# Allegro board PMOD2BNCSIMPLE_v1_04.brd
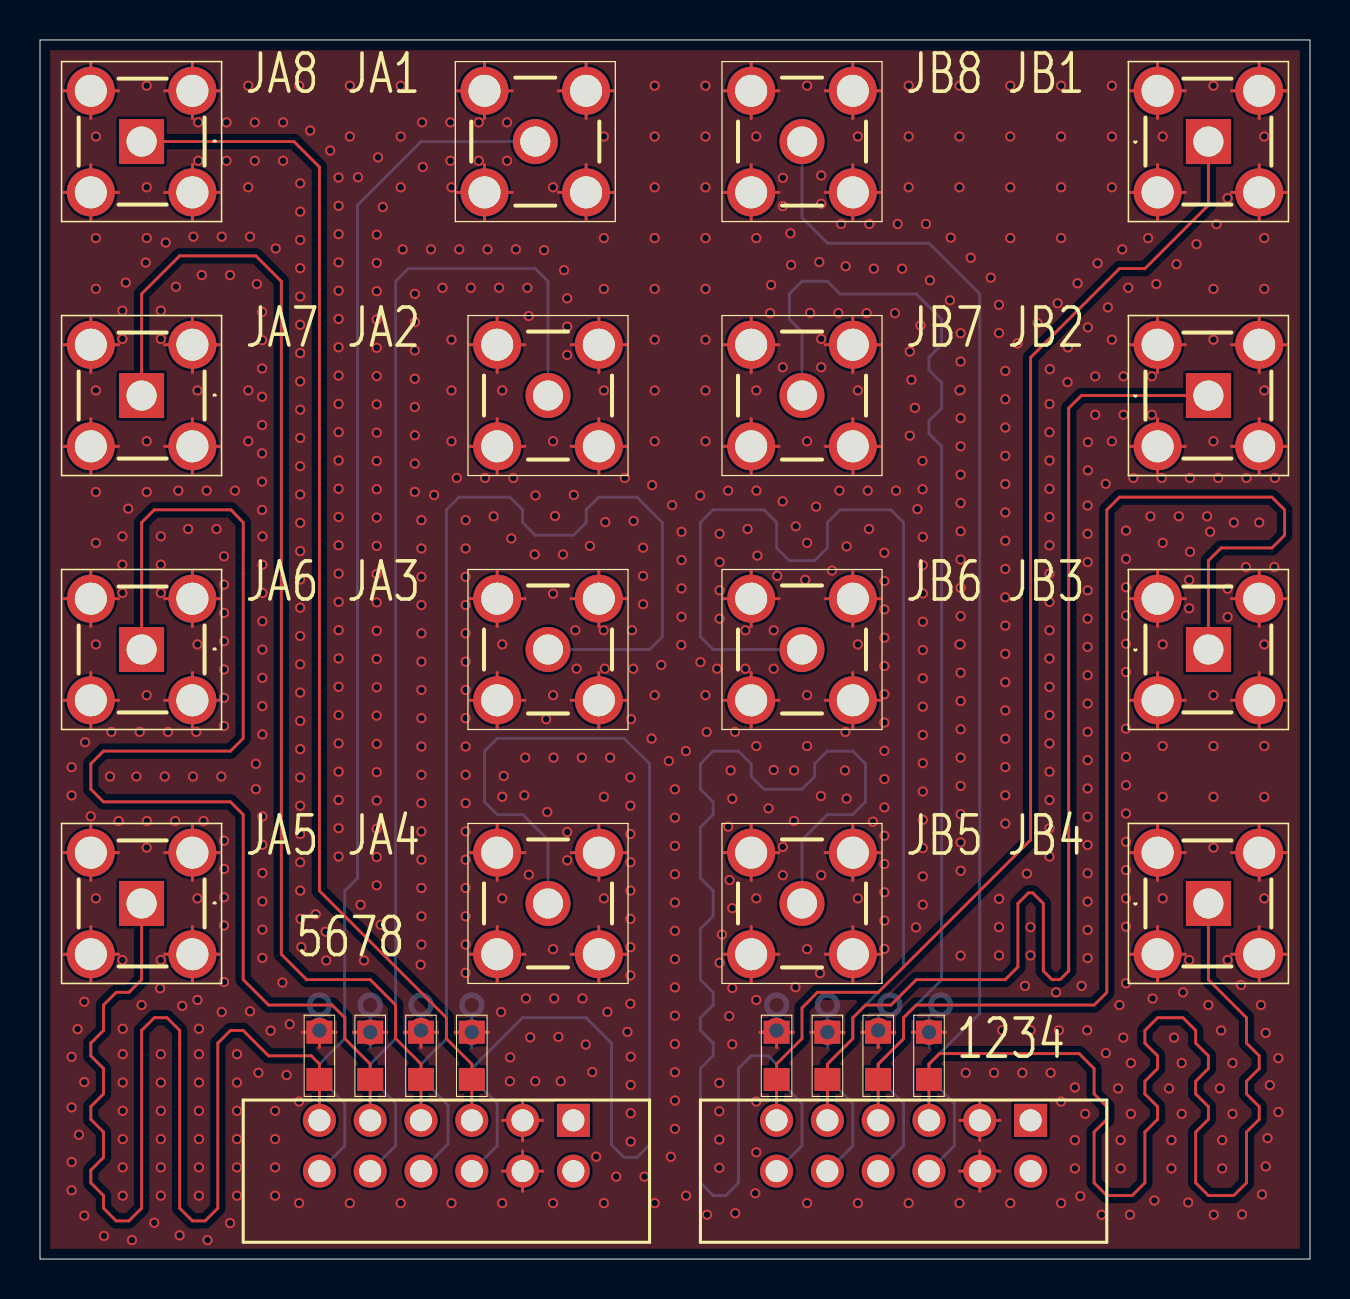
[diagram p0: board, top side]
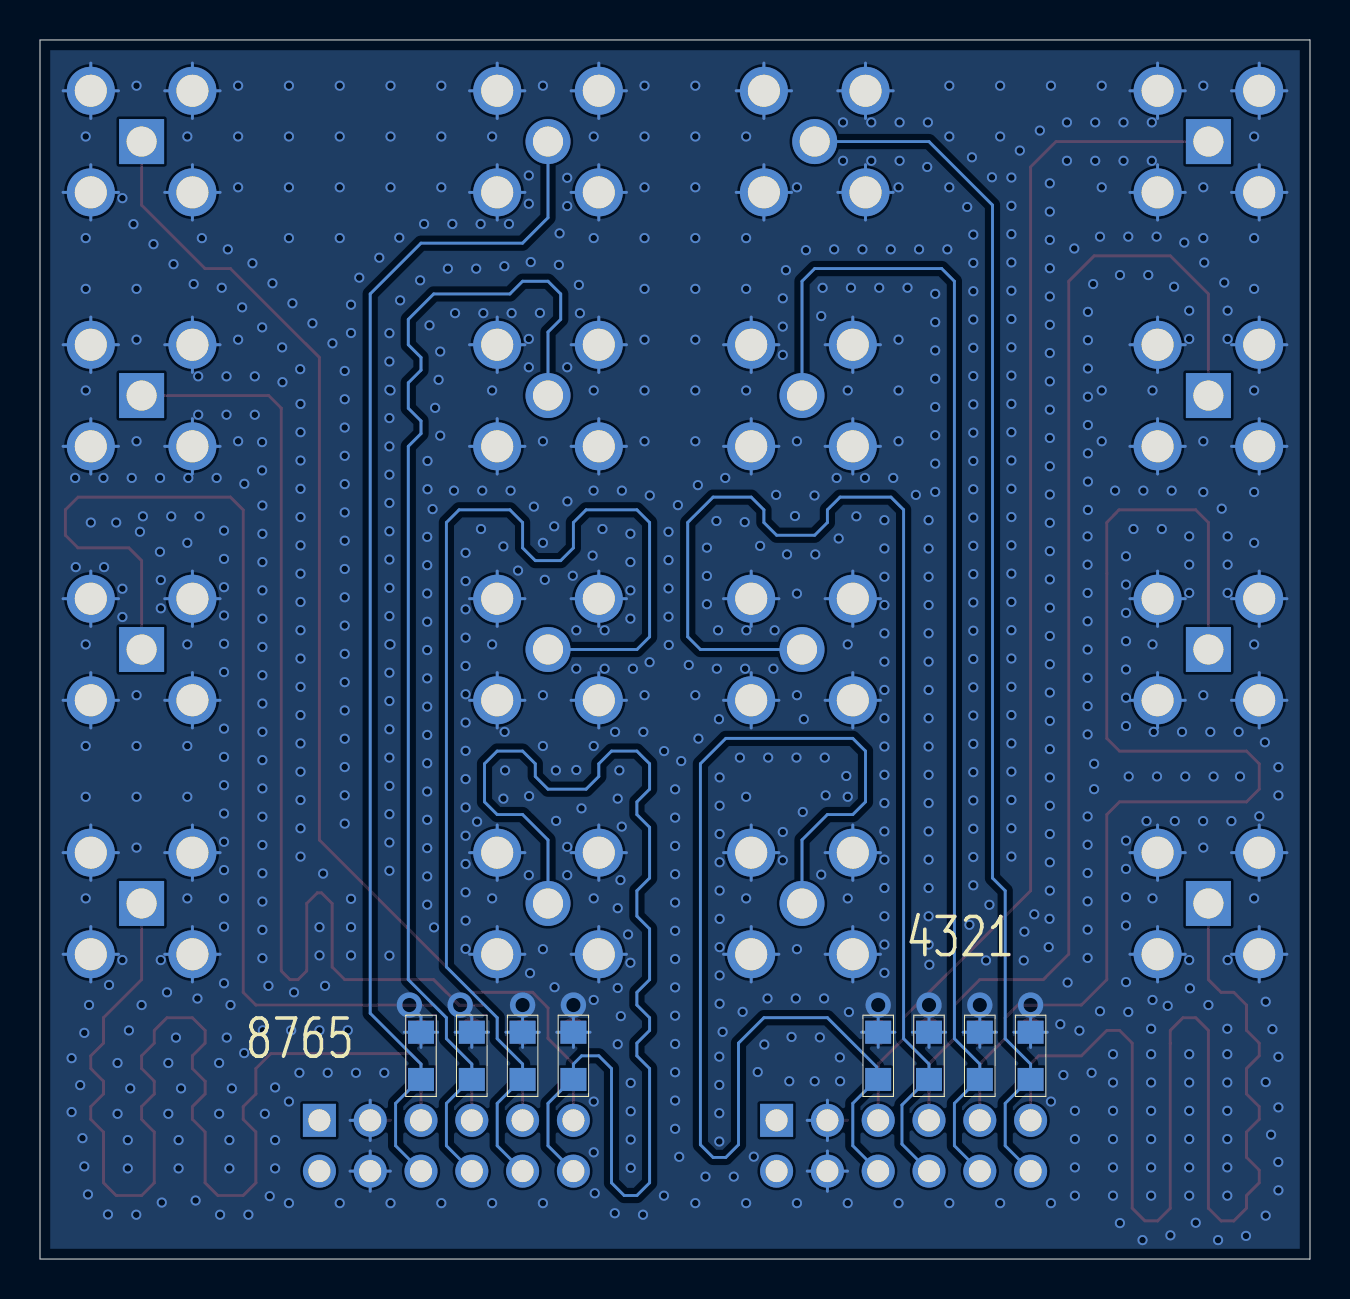
[diagram p1: board, bottom side, seen from below]

Outline 63.5 x 60.96 mm; copper layers: TOP, GND1, GND2, BOTTOM. Coordinates in mm from the lower left corner of the outline.
Outline path: 0,60.96 63.5,60.96 63.5,0 0,0 0,60.96

## Design rules (mm)
constraint set DEFAULT: min track width 0.145

## Placement (name value [footprint] x y rotation side)
J1  71764_0114  [717640112]  10.16 0.84 180 top
J2  71764_0114  [717640112]  33.02 0.84 180 top
R1  -  [RES_0805]  21.59 10.16 90 top
R2  -  [RES_0805]  19.05 10.16 90 top
R3  -  [RES_0805]  16.51 10.16 90 top
R4  -  [RES_0805]  13.97 10.16 90 top
R5  -  [RES_0805]  13.97 10.16 90 bottom
R6  -  [RES_0805]  16.51 10.16 90 bottom
R7  -  [RES_0805]  19.05 10.16 90 bottom
R8  -  [RES_0805]  21.59 10.16 90 bottom
R9  -  [RES_0805]  44.45 10.16 90 top
R10  -  [RES_0805]  41.91 10.16 90 top
R11  -  [RES_0805]  39.37 10.16 90 top
R12  -  [RES_0805]  36.83 10.16 90 top
R13  -  [RES_0805]  36.83 10.16 90 bottom
R14  -  [RES_0805]  39.37 10.16 90 bottom
R15  -  [RES_0805]  41.91 10.16 90 bottom
R16  -  [RES_0805]  44.45 10.16 90 bottom
U1  -  [SMA-R-RA]  5.08 17.78 180 top
U2  -  [SMAFST_PCBN]  24.77 55.88 0 top
U3  -  [SMA-R-RA]  5.08 30.48 180 top
U4  -  [SMAFST_PCBN]  25.4 43.18 0 top
U5  -  [SMA-R-RA]  5.08 43.18 180 top
U6  -  [SMAFST_PCBN]  25.4 30.48 0 top
U7  -  [SMA-R-RA]  5.08 55.88 180 top
U8  -  [SMAFST_PCBN]  25.4 17.78 0 top
U9  -  [SMA-R-RA]  58.42 55.88 0 top
U10  -  [SMAFST_PCBN]  38.1 17.78 0 top
U11  -  [SMA-R-RA]  58.42 43.18 0 top
U12  -  [SMAFST_PCBN]  38.1 30.48 0 top
U13  -  [SMA-R-RA]  58.42 30.48 0 top
U14  -  [SMAFST_PCBN]  38.1 43.18 0 top
U15  -  [SMA-R-RA]  58.42 17.78 0 top
U16  -  [SMAFST_PCBN]  38.1 55.88 0 top

## Library data of the parts
J1 J2 = 71764_0114
R1-R3 R5-R16 = RES_0805
R4 = RES_0805: signal model: resistorPack_850
U1 U3 U5 U7 U9 U11 U13 U15 = SMA-R-RA
U2 U4 U6 U8 U10 U12 U14 U16 = SMAFST_PCBN

## Footprints (pads in the part's own frame, mm; a bottom-side part is the same pattern mirrored in y, then rotated)
717640112
  rect 1.651x1.651 hole 1.1: 1(-16.51,-6.096)
  round 1.651 hole 1.1: 2(-16.51,-3.556) 3(-13.97,-6.096) 4(-13.97,-3.556) 5(-11.43,-6.096) 6(-11.43,-3.556) 7(-8.89,-6.096) 8(-8.89,-3.556) 9(-6.35,-6.096) 10(-6.35,-3.556) 11(-3.81,-6.096) 12(-3.81,-3.556)
RES_0805
  rect 1.151x1.3 smd: 1(1.181,0) 2(-1.181,0)
SMA-R-RA
  rect 2.25x2.25 hole 1.501: 1(0,0)
  round 2.4 hole 1.6: 2(-2.54,2.54) 3(-2.54,-2.54) 4(2.54,-2.54) 5(2.54,2.54)
SMAFST_PCBN
  round 2.25 hole 1.501: 1(0,0)
  round 2.4 hole 1.6: 2(-2.54,-2.54) 3(2.54,-2.54) 4(2.54,2.54) 5(-2.54,2.54)

## Nets
GND: J1.3 J1.4 J2.3 J2.4 R1.1 R2.1 R3.1 R4.1 R5.1 R6.1 R7.1 R8.1 R9.1 R10.1 R11.1 R12.1 R13.1 R14.1 R15.1 R16.1 U1.2 U1.3 U1.4 U1.5 U2.2 U2.3 U2.4 U2.5 U3.2 U3.3 U3.4 U3.5 U4.2 U4.3 U4.4 U4.5 U5.2 U5.3 U5.4 U5.5 U6.2 U6.3 U6.4 U6.5 U7.2 U7.3 U7.4 U7.5 U8.2 U8.3 U8.4 U8.5 U9.2 U9.3 U9.4 U9.5 U10.2 U10.3 U10.4 U10.5 U11.2 U11.3 U11.4 U11.5 U12.2 U12.3 U12.4 U12.5 U13.2 U13.3 U13.4 U13.5 U14.2 U14.3 U14.4 U14.5 U15.2 U15.3 U15.4 U15.5 U16.2 U16.3 U16.4 U16.5
N17882: J1.11 R4.2 U1.1
N17894: J1.9 R3.2 U3.1
N17906: J1.7 R2.2 U5.1
N17918: J1.5 R1.2 U7.1
N17930: J1.12 R5.2 U2.1
N17948: J1.10 R6.2 U4.1
N17973: J1.8 R7.2 U6.1
N17998: J1.6 R8.2 U8.1
N19655: J2.11 R12.2 U9.1
N19661: J2.9 R11.2 U11.1
N19667: J2.7 R10.2 U13.1
N19673: J2.5 R9.2 U15.1
N19679: J2.12 R13.2 U10.1
N19687: J2.10 R14.2 U12.1
N19697: J2.8 R15.2 U14.1
N19707: J2.6 R16.2 U16.1

Pads without a net: J1 1 2; J2 1 2

## Via types
v1: diameter 0.508, hole 0.33, TOP to BOTTOM, 855 vias
v2: diameter 1.27, hole 0.711, TOP to GND1, 8 vias
v3: diameter 1.27, hole 0.711, GND2 to BOTTOM, 8 vias

## Routing (per net, layer and track width the routed paths; a pad name or vN(x,y) marks a point on that pad's centre or on a via; arc(x,y) is an arc through that point)
GND: length 1527.2
  TOP w0.145: 23.12,4.39 J1.4 ; J1.4 24.13,3.39 ; J1.4 25.14,4.39 ; J1.4 24.13,5.4 ; U1.3 7.62,21.7 ; U1.3 6.24,20.32 ; U1.3 9,20.32 ; U1.3 7.62,18.94 ; U10.2 36.94,15.24 ; U10.2 34.18,15.24 ; U10.2 35.56,16.62 ; U10.2 35.56,13.86 ; 21.48,20.32 U8.5 ; U8.5 22.86,18.94 ; U8.5 22.86,21.7 ; U8.5 24.24,20.32 ; 60.96,13.86 U15.4 ; U15.4 60.96,16.62 ; U15.4 62.34,15.24 ; U15.4 59.58,15.24 ; U1.2 9,15.24 ; U1.2 7.62,16.62 ; U1.2 6.24,15.24 ; U1.2 7.62,13.86 ; 39.26,20.32 U10.4 ; U10.4 42.02,20.32 ; U10.4 40.64,21.7 ; U10.4 40.64,18.94 ; 60.96,39.26 U11.4 ; U11.4 62.34,40.64 ; U11.4 59.58,40.64 ; U11.4 60.96,42.02 ; U3.3 9,33.02 ; U3.3 6.24,33.02 ; U3.3 7.62,34.4 ; U3.3 7.62,31.64 ; U15.5 62.34,20.32 ; U15.5 59.58,20.32 ; U15.5 60.96,18.94 ; U15.5 60.96,21.7 ; 1.16,58.42 U7.4 ; U7.4 2.54,59.8 ; U7.4 3.92,58.42 ; U7.4 2.54,57.04 ; U10.5 36.94,20.32 ; U10.5 35.56,18.94 ; U10.5 34.18,20.32 ; U10.5 35.56,21.7 ; U8.4 27.94,21.7 ; U8.4 26.56,20.32 ; U8.4 27.94,18.94 ; U8.4 29.32,20.32 ; U14.4 42.02,45.72 ; U14.4 40.64,44.34 ; U14.4 39.26,45.72 ; U14.4 40.64,47.1 ; 40.64,51.96 U16.3 ; U16.3 42.02,53.34 ; U16.3 40.64,54.72 ; U16.3 39.26,53.34 ; 34.18,27.94 U12.2 ; U12.2 35.56,26.56 ; U12.2 36.94,27.94 ; U12.2 35.56,29.32 ; 43.62,11.34 v2(44.45,11.34) 45.28,11.34 ; U5.3 7.62,47.1 ; U5.3 9,45.72 ; U5.3 6.24,45.72 ; U5.3 7.62,44.34 ; 2.54,18.94 U1.4 ; U1.4 3.92,20.32 ; U1.4 1.16,20.32 ; U1.4 2.54,21.7 ; 59.58,45.72 U11.5 ; U11.5 62.34,45.72 ; U11.5 60.96,47.1 ; U11.5 60.96,44.34 ; 19.05,10.58 R2.1 ; R2.1 18.22,11.34 ; R2.1 19.88,11.34 ; U5.4 3.92,45.72 ; U5.4 2.54,44.34 ; U5.4 2.54,47.1 ; U5.4 1.16,45.72 ; U12.3 40.64,29.32 ; U12.3 40.64,26.56 ; U12.3 42.02,27.94 ; U12.3 39.26,27.94 ; 22.86,13.86 U8.2 ; U8.2 21.48,15.24 ; U8.2 22.86,16.62 ; U8.2 24.24,15.24 ; U11.2 55.88,47.1 ; U11.2 54.5,45.72 ; U11.2 55.88,44.34 ; U11.2 57.26,45.72 ; U14.3 40.64,42.02 ; U14.3 40.64,39.26 ; U14.3 39.26,40.64 ; U14.3 42.02,40.64 ; 36,11.34 R12.1 ; R12.1 36.83,10.58 ; R12.1 37.66,11.34 ; 34.18,45.72 U14.5 ; U14.5 35.56,44.34 ; U14.5 35.56,47.1 ; U14.5 36.94,45.72 ; 39.26,15.24 U10.3 ; U10.3 40.64,13.86 ; U10.3 42.02,15.24 ; U10.3 40.64,16.62 ; R4.1 14.8,11.34 ; R4.1 13.97,10.58 ; R4.1 13.14,11.34 ; 59.58,58.42 U9.5 ; U9.5 60.96,57.04 ; U9.5 60.96,59.8 ; U9.5 62.34,58.42 ; U7.5 3.92,53.34 ; U7.5 2.54,54.72 ; U7.5 2.54,51.96 ; U7.5 1.16,53.34 ; U15.3 57.26,15.24 ; U15.3 55.88,13.86 ; U15.3 54.5,15.24 ; U15.3 55.88,16.62 ; 22.23,51.96 U2.2 ; U2.2 22.23,54.72 ; U2.2 20.84,53.34 ; U2.2 23.61,53.34 ; U9.3 57.26,53.34 ; U9.3 54.5,53.34 ; U9.3 55.88,54.72 ; U9.3 55.88,51.96 ; 59.58,33.02 U13.5 ; U13.5 60.96,34.4 ; U13.5 60.96,31.64 ; U13.5 62.34,33.02 ; 35.56,57.04 U16.5 ; U16.5 34.18,58.42 ; U16.5 35.56,59.8 ; U16.5 36.94,58.42 ; U14.2 36.94,40.64 ; U14.2 35.56,42.02 ; U14.2 35.56,39.26 ; U14.2 34.18,40.64 ; 40.2,11.34 v2(39.37,11.34) 38.54,11.34 ; 54.5,33.02 U13.2 ; U13.2 55.88,34.4 ; U13.2 57.26,33.02 ; U13.2 55.88,31.64 ; U6.4 29.32,33.02 ; U6.4 26.56,33.02 ; U6.4 27.94,34.4 ; U6.4 27.94,31.64 ; 39.26,58.42 U16.4 ; U16.4 40.64,57.04 ; U16.4 42.02,58.42 ; U16.4 40.64,59.8 ; U6.2 24.24,27.94 ; U6.2 22.86,26.56 ; U6.2 21.48,27.94 ; U6.2 22.86,29.32 ; 54.5,58.42 U9.2 ; U9.2 55.88,59.8 ; U9.2 57.26,58.42 ; U9.2 55.88,57.04 ; 2.54,26.56 U3.5 ; U3.5 1.16,27.94 ; U3.5 2.54,29.32 ; U3.5 3.92,27.94 ; J2.3 48,6.93 ; J2.3 46.99,7.94 ; J2.3 46.99,5.93 ; J2.3 45.98,6.93 ; 34.18,33.02 U12.5 ; U12.5 35.56,34.4 ; U12.5 35.56,31.64 ; U12.5 36.94,33.02 ; U4.3 29.32,40.64 ; U4.3 27.94,39.26 ; U4.3 26.56,40.64 ; U4.3 27.94,42.02 ; 23.12,6.93 J1.3 ; J1.3 24.13,5.93 ; J1.3 25.14,6.93 ; J1.3 24.13,7.94 ; 6.24,27.94 U3.2 ; U3.2 7.62,26.56 ; U3.2 9,27.94 ; U3.2 7.62,29.32 ; 2.54,13.86 U1.5 ; U1.5 2.54,16.62 ; U1.5 1.16,15.24 ; U1.5 3.92,15.24 ; 60.96,26.56 U13.4 ; U13.4 59.58,27.94 ; U13.4 62.34,27.94 ; U13.4 60.96,29.32 ; 20.76,11.34 v2(21.59,11.34) 22.42,11.34 ; U8.3 27.94,16.62 ; U8.3 27.94,13.86 ; U8.3 29.32,15.24 ; U8.3 26.56,15.24 ; U2.4 27.3,59.8 ; U2.4 28.69,58.42 ; U2.4 25.92,58.42 ; U2.4 27.3,57.04 ; 55.88,26.56 U13.3 ; U13.3 57.26,27.94 ; U13.3 55.88,29.32 ; U13.3 54.5,27.94 ; U4.5 22.86,47.1 ; U4.5 21.48,45.72 ; U4.5 24.24,45.72 ; U4.5 22.86,44.34 ; 59.58,53.34 U9.4 ; U9.4 60.96,54.72 ; U9.4 62.34,53.34 ; U9.4 60.96,51.96 ; 2.54,39.26 U5.5 ; U5.5 1.16,40.64 ; U5.5 2.54,42.02 ; U5.5 3.92,40.64 ; R10.1 42.74,11.34 ; R10.1 41.08,11.34 ; R10.1 41.91,10.58 ; U15.2 57.26,20.32 ; U15.2 55.88,21.7 ; U15.2 54.5,20.32 ; U15.2 55.88,18.94 ; U6.5 24.24,33.02 ; U6.5 22.86,34.4 ; U6.5 21.48,33.02 ; U6.5 22.86,31.64 ; 1.16,33.02 U3.4 ; U3.4 2.54,31.64 ; U3.4 3.92,33.02 ; U3.4 2.54,34.4 ; 27.94,44.34 U4.4 ; U4.4 27.94,47.1 ; U4.4 29.32,45.72 ; U4.4 26.56,45.72 ; 26.56,27.94 U6.3 ; U6.3 27.94,29.32 ; U6.3 27.94,26.56 ; U6.3 29.32,27.94 ; U11.3 55.88,42.02 ; U11.3 55.88,39.26 ; U11.3 57.26,40.64 ; U11.3 54.5,40.64 ; U7.2 9,53.34 ; U7.2 6.24,53.34 ; U7.2 7.62,54.72 ; U7.2 7.62,51.96 ; U12.4 40.64,34.4 ; U12.4 39.26,33.02 ; U12.4 40.64,31.64 ; U12.4 42.02,33.02 ; U16.2 35.56,54.72 ; U16.2 36.94,53.34 ; U16.2 35.56,51.96 ; U16.2 34.18,53.34 ; 20.84,58.42 U2.5 ; U2.5 22.23,57.04 ; U2.5 23.61,58.42 ; U2.5 22.23,59.8 ; 7.62,57.04 U7.3 ; U7.3 7.62,59.8 ; U7.3 6.24,58.42 ; U7.3 9,58.42 ; 21.48,40.64 U4.2 ; U4.2 24.24,40.64 ; U4.2 22.86,42.02 ; U4.2 22.86,39.26 ; J2.4 48,4.39 ; J2.4 46.99,5.4 ; J2.4 46.99,3.39 ; J2.4 45.98,4.39 ; U2.3 28.69,53.34 ; U2.3 27.3,51.96 ; U2.3 25.92,53.34 ; U2.3 27.3,54.72 ; 15.68,11.34 v2(16.51,11.34) 17.34,11.34 ; 7.62,39.26 U5.2 ; U5.2 7.62,42.02 ; U5.2 9,40.64 ; U5.2 6.24,40.64
  GND1 w0.145: U6.4 27.94,34.4 ; U6.4 27.94,31.64 ; U6.4 26.56,33.02 ; U6.4 29.32,33.02 ; U2.5 23.61,58.42 ; U2.5 22.23,59.8 ; U2.5 22.23,57.04 ; U2.5 20.84,58.42 ; 54.5,53.34 U9.3 ; U9.3 55.88,54.72 ; U9.3 55.88,51.96 ; U9.3 57.26,53.34 ; 34.18,20.32 U10.5 ; U10.5 35.56,21.7 ; U10.5 35.56,18.94 ; U10.5 36.94,20.32 ; 54.5,15.24 U15.3 ; U15.3 57.26,15.24 ; U15.3 55.88,13.86 ; U15.3 55.88,16.62 ; U3.4 2.54,34.4 ; U3.4 1.16,33.02 ; U3.4 2.54,31.64 ; U3.4 3.92,33.02 ; U6.5 22.86,34.4 ; U6.5 22.86,31.64 ; U6.5 21.48,33.02 ; U6.5 24.24,33.02 ; J1.4 25.14,4.39 ; J1.4 24.13,5.4 ; J1.4 23.12,4.39 ; J1.4 24.13,3.39 ; U2.4 27.3,59.8 ; U2.4 28.69,58.42 ; U2.4 25.92,58.42 ; U2.4 27.3,57.04 ; 6.24,33.02 U3.3 ; U3.3 7.62,31.64 ; U3.3 7.62,34.4 ; U3.3 9,33.02 ; 23.12,6.93 J1.3 ; J1.3 24.13,7.94 ; J1.3 24.13,5.93 ; J1.3 25.14,6.93 ; U16.5 36.94,58.42 ; U16.5 34.18,58.42 ; U16.5 35.56,59.8 ; U16.5 35.56,57.04 ; U12.2 36.94,27.94 ; U12.2 34.18,27.94 ; U12.2 35.56,29.32 ; U12.2 35.56,26.56 ; U3.2 9,27.94 ; U3.2 6.24,27.94 ; U3.2 7.62,26.56 ; U3.2 7.62,29.32 ; 59.58,58.42 U9.5 ; U9.5 62.34,58.42 ; U9.5 60.96,57.04 ; U9.5 60.96,59.8 ; 2.54,51.96 U7.5 ; U7.5 2.54,54.72 ; U7.5 1.16,53.34 ; U7.5 3.92,53.34 ; 27.94,26.56 U6.3 ; U6.3 27.94,29.32 ; U6.3 29.32,27.94 ; U6.3 26.56,27.94 ; 7.62,44.34 U5.3 ; U5.3 9,45.72 ; U5.3 7.62,47.1 ; U5.3 6.24,45.72 ; 6.24,15.24 U1.2 ; U1.2 9,15.24 ; U1.2 7.62,16.62 ; U1.2 7.62,13.86 ; 54.5,58.42 U9.2 ; U9.2 55.88,57.04 ; U9.2 57.26,58.42 ; U9.2 55.88,59.8 ; 21.48,40.64 U4.2 ; U4.2 24.24,40.64 ; U4.2 22.86,42.02 ; U4.2 22.86,39.26 ; 55.88,31.64 U13.2 ; U13.2 57.26,33.02 ; U13.2 55.88,34.4 ; U13.2 54.5,33.02 ; 60.96,44.34 U11.5 ; U11.5 59.58,45.72 ; U11.5 62.34,45.72 ; U11.5 60.96,47.1 ; U4.3 29.32,40.64 ; U4.3 27.94,42.02 ; U4.3 27.94,39.26 ; U4.3 26.56,40.64 ; U8.5 22.86,21.7 ; U8.5 24.24,20.32 ; U8.5 21.48,20.32 ; U8.5 22.86,18.94 ; U16.4 40.64,59.8 ; U16.4 39.26,58.42 ; U16.4 42.02,58.42 ; U16.4 40.64,57.04 ; 7.62,51.96 U7.2 ; U7.2 7.62,54.72 ; U7.2 6.24,53.34 ; U7.2 9,53.34 ; U8.2 22.86,16.62 ; U8.2 22.86,13.86 ; U8.2 24.24,15.24 ; U8.2 21.48,15.24 ; 40.64,13.86 U10.3 ; U10.3 40.64,16.62 ; U10.3 39.26,15.24 ; U10.3 42.02,15.24 ; U8.3 29.32,15.24 ; U8.3 27.94,16.62 ; U8.3 26.56,15.24 ; U8.3 27.94,13.86 ; U3.5 3.92,27.94 ; U3.5 2.54,29.32 ; U3.5 1.16,27.94 ; U3.5 2.54,26.56 ; U13.3 55.88,29.32 ; U13.3 55.88,26.56 ; U13.3 57.26,27.94 ; U13.3 54.5,27.94 ; U1.3 9,20.32 ; U1.3 6.24,20.32 ; U1.3 7.62,21.7 ; U1.3 7.62,18.94 ; U13.5 60.96,34.4 ; U13.5 60.96,31.64 ; U13.5 62.34,33.02 ; U13.5 59.58,33.02 ; U7.4 2.54,59.8 ; U7.4 2.54,57.04 ; U7.4 1.16,58.42 ; U7.4 3.92,58.42 ; 39.26,53.34 U16.3 ; U16.3 40.64,51.96 ; U16.3 42.02,53.34 ; U16.3 40.64,54.72 ; 40.64,39.26 U14.3 ; U14.3 40.64,42.02 ; U14.3 42.02,40.64 ; U14.3 39.26,40.64 ; U6.2 24.24,27.94 ; U6.2 21.48,27.94 ; U6.2 22.86,29.32 ; U6.2 22.86,26.56 ; 35.56,51.96 U16.2 ; U16.2 36.94,53.34 ; U16.2 34.18,53.34 ; U16.2 35.56,54.72 ; 2.54,39.26 U5.5 ; U5.5 3.92,40.64 ; U5.5 1.16,40.64 ; U5.5 2.54,42.02 ; 39.26,45.72 U14.4 ; U14.4 42.02,45.72 ; U14.4 40.64,47.1 ; U14.4 40.64,44.34 ; 60.96,26.56 U13.4 ; U13.4 59.58,27.94 ; U13.4 62.34,27.94 ; U13.4 60.96,29.32 ; U12.3 42.02,27.94 ; U12.3 40.64,26.56 ; U12.3 40.64,29.32 ; U12.3 39.26,27.94 ; 34.18,40.64 U14.2 ; U14.2 36.94,40.64 ; U14.2 35.56,39.26 ; U14.2 35.56,42.02 ; 20.84,53.34 U2.2 ; U2.2 23.61,53.34 ; U2.2 22.23,51.96 ; U2.2 22.23,54.72 ; U12.4 42.02,33.02 ; U12.4 40.64,34.4 ; U12.4 40.64,31.64 ; U12.4 39.26,33.02 ; 21.48,45.72 U4.5 ; U4.5 24.24,45.72 ; U4.5 22.86,44.34 ; U4.5 22.86,47.1 ; U10.4 40.64,21.7 ; U10.4 42.02,20.32 ; U10.4 40.64,18.94 ; U10.4 39.26,20.32 ; 35.56,44.34 U14.5 ; U14.5 36.94,45.72 ; U14.5 34.18,45.72 ; U14.5 35.56,47.1 ; 54.5,45.72 U11.2 ; U11.2 55.88,47.1 ; U11.2 55.88,44.34 ; U11.2 57.26,45.72 ; U12.5 36.94,33.02 ; U12.5 35.56,34.4 ; U12.5 34.18,33.02 ; U12.5 35.56,31.64 ; U4.4 27.94,47.1 ; U4.4 26.56,45.72 ; U4.4 29.32,45.72 ; U4.4 27.94,44.34 ; 46.99,3.39 J2.4 ; J2.4 45.98,4.39 ; J2.4 48,4.39 ; J2.4 46.99,5.4 ; U7.3 7.62,59.8 ; U7.3 6.24,58.42 ; U7.3 9,58.42 ; U7.3 7.62,57.04 ; 6.24,40.64 U5.2 ; U5.2 9,40.64 ; U5.2 7.62,39.26 ; U5.2 7.62,42.02 ; U15.2 55.88,21.7 ; U15.2 57.26,20.32 ; U15.2 54.5,20.32 ; U15.2 55.88,18.94 ; 1.16,45.72 U5.4 ; U5.4 3.92,45.72 ; U5.4 2.54,44.34 ; U5.4 2.54,47.1 ; U1.4 2.54,21.7 ; U1.4 1.16,20.32 ; U1.4 3.92,20.32 ; U1.4 2.54,18.94 ; 1.16,15.24 U1.5 ; U1.5 2.54,13.86 ; U1.5 2.54,16.62 ; U1.5 3.92,15.24 ; 60.96,39.26 U11.4 ; U11.4 60.96,42.02 ; U11.4 59.58,40.64 ; U11.4 62.34,40.64 ; 26.56,20.32 U8.4 ; U8.4 27.94,21.7 ; U8.4 29.32,20.32 ; U8.4 27.94,18.94 ; 60.96,18.94 U15.5 ; U15.5 62.34,20.32 ; U15.5 60.96,21.7 ; U15.5 59.58,20.32 ; J2.3 48,6.93 ; J2.3 46.99,7.94 ; J2.3 46.99,5.93 ; J2.3 45.98,6.93 ; 54.5,40.64 U11.3 ; U11.3 55.88,39.26 ; U11.3 55.88,42.02 ; U11.3 57.26,40.64 ; 27.3,51.96 U2.3 ; U2.3 28.69,53.34 ; U2.3 27.3,54.72 ; U2.3 25.92,53.34 ; 60.96,13.86 U15.4 ; U15.4 60.96,16.62 ; U15.4 62.34,15.24 ; U15.4 59.58,15.24 ; 59.58,53.34 U9.4 ; U9.4 60.96,54.72 ; U9.4 60.96,51.96 ; U9.4 62.34,53.34 ; U10.2 36.94,15.24 ; U10.2 35.56,16.62 ; U10.2 34.18,15.24 ; U10.2 35.56,13.86
  GND2 w0.145: 55.88,39.26 U11.3 ; U11.3 54.5,40.64 ; U11.3 55.88,42.02 ; U11.3 57.26,40.64 ; U13.3 57.26,27.94 ; U13.3 55.88,26.56 ; U13.3 55.88,29.32 ; U13.3 54.5,27.94 ; U1.2 7.62,16.62 ; U1.2 7.62,13.86 ; U1.2 9,15.24 ; U1.2 6.24,15.24 ; U3.5 2.54,29.32 ; U3.5 2.54,26.56 ; U3.5 3.92,27.94 ; U3.5 1.16,27.94 ; 40.64,57.04 U16.4 ; U16.4 40.64,59.8 ; U16.4 42.02,58.42 ; U16.4 39.26,58.42 ; U6.3 27.94,29.32 ; U6.3 26.56,27.94 ; U6.3 27.94,26.56 ; U6.3 29.32,27.94 ; U11.5 60.96,47.1 ; U11.5 62.34,45.72 ; U11.5 60.96,44.34 ; U11.5 59.58,45.72 ; 7.62,57.04 U7.3 ; U7.3 9,58.42 ; U7.3 6.24,58.42 ; U7.3 7.62,59.8 ; U5.5 3.92,40.64 ; U5.5 2.54,39.26 ; U5.5 1.16,40.64 ; U5.5 2.54,42.02 ; 39.26,45.72 U14.4 ; U14.4 40.64,44.34 ; U14.4 40.64,47.1 ; U14.4 42.02,45.72 ; U10.3 42.02,15.24 ; U10.3 39.26,15.24 ; U10.3 40.64,13.86 ; U10.3 40.64,16.62 ; U13.5 62.34,33.02 ; U13.5 60.96,34.4 ; U13.5 59.58,33.02 ; U13.5 60.96,31.64 ; 54.5,45.72 U11.2 ; U11.2 55.88,44.34 ; U11.2 55.88,47.1 ; U11.2 57.26,45.72 ; U8.5 22.86,21.7 ; U8.5 21.48,20.32 ; U8.5 24.24,20.32 ; U8.5 22.86,18.94 ; U5.4 2.54,47.1 ; U5.4 3.92,45.72 ; U5.4 2.54,44.34 ; U5.4 1.16,45.72 ; 35.56,26.56 U12.2 ; U12.2 34.18,27.94 ; U12.2 36.94,27.94 ; U12.2 35.56,29.32 ; 35.56,18.94 U10.5 ; U10.5 34.18,20.32 ; U10.5 35.56,21.7 ; U10.5 36.94,20.32 ; 6.24,45.72 U5.3 ; U5.3 7.62,47.1 ; U5.3 9,45.72 ; U5.3 7.62,44.34 ; 1.16,53.34 U7.5 ; U7.5 2.54,54.72 ; U7.5 3.92,53.34 ; U7.5 2.54,51.96 ; U6.4 27.94,34.4 ; U6.4 29.32,33.02 ; U6.4 27.94,31.64 ; U6.4 26.56,33.02 ; U16.5 36.94,58.42 ; U16.5 35.56,59.8 ; U16.5 35.56,57.04 ; U16.5 34.18,58.42 ; U6.5 24.24,33.02 ; U6.5 22.86,31.64 ; U6.5 22.86,34.4 ; U6.5 21.48,33.02 ; 39.26,33.02 U12.4 ; U12.4 40.64,31.64 ; U12.4 40.64,34.4 ; U12.4 42.02,33.02 ; 35.56,44.34 U14.5 ; U14.5 34.18,45.72 ; U14.5 35.56,47.1 ; U14.5 36.94,45.72 ; U9.5 60.96,59.8 ; U9.5 59.58,58.42 ; U9.5 60.96,57.04 ; U9.5 62.34,58.42 ; U2.4 28.69,58.42 ; U2.4 27.3,59.8 ; U2.4 27.3,57.04 ; U2.4 25.92,58.42 ; 22.86,44.34 U4.5 ; U4.5 22.86,47.1 ; U4.5 24.24,45.72 ; U4.5 21.48,45.72 ; J2.4 48,4.39 ; J2.4 45.98,4.39 ; J2.4 46.99,3.39 ; J2.4 46.99,5.4 ; 35.56,39.26 U14.2 ; U14.2 36.94,40.64 ; U14.2 34.18,40.64 ; U14.2 35.56,42.02 ; U4.2 24.24,40.64 ; U4.2 22.86,42.02 ; U4.2 21.48,40.64 ; U4.2 22.86,39.26 ; 1.16,15.24 U1.5 ; U1.5 2.54,16.62 ; U1.5 3.92,15.24 ; U1.5 2.54,13.86 ; 2.54,57.04 U7.4 ; U7.4 2.54,59.8 ; U7.4 1.16,58.42 ; U7.4 3.92,58.42 ; U10.4 42.02,20.32 ; U10.4 40.64,18.94 ; U10.4 39.26,20.32 ; U10.4 40.64,21.7 ; U15.5 60.96,21.7 ; U15.5 62.34,20.32 ; U15.5 59.58,20.32 ; U15.5 60.96,18.94 ; U12.3 40.64,29.32 ; U12.3 42.02,27.94 ; U12.3 40.64,26.56 ; U12.3 39.26,27.94 ; 26.56,20.32 U8.4 ; U8.4 27.94,21.7 ; U8.4 27.94,18.94 ; U8.4 29.32,20.32 ; U2.5 23.61,58.42 ; U2.5 22.23,59.8 ; U2.5 20.84,58.42 ; U2.5 22.23,57.04 ; 39.26,53.34 U16.3 ; U16.3 40.64,51.96 ; U16.3 40.64,54.72 ; U16.3 42.02,53.34 ; U10.2 35.56,16.62 ; U10.2 36.94,15.24 ; U10.2 34.18,15.24 ; U10.2 35.56,13.86 ; 23.12,4.39 J1.4 ; J1.4 25.14,4.39 ; J1.4 24.13,5.4 ; J1.4 24.13,3.39 ; U9.4 60.96,54.72 ; U9.4 62.34,53.34 ; U9.4 59.58,53.34 ; U9.4 60.96,51.96 ; J2.3 46.99,7.94 ; J2.3 46.99,5.93 ; J2.3 45.98,6.93 ; J2.3 48,6.93 ; J1.3 24.13,7.94 ; J1.3 25.14,6.93 ; J1.3 24.13,5.93 ; J1.3 23.12,6.93 ; 54.5,33.02 U13.2 ; U13.2 55.88,34.4 ; U13.2 55.88,31.64 ; U13.2 57.26,33.02 ; 39.26,40.64 U14.3 ; U14.3 42.02,40.64 ; U14.3 40.64,39.26 ; U14.3 40.64,42.02 ; 59.58,40.64 U11.4 ; U11.4 62.34,40.64 ; U11.4 60.96,42.02 ; U11.4 60.96,39.26 ; U1.4 3.92,20.32 ; U1.4 2.54,18.94 ; U1.4 1.16,20.32 ; U1.4 2.54,21.7 ; 7.62,18.94 U1.3 ; U1.3 7.62,21.7 ; U1.3 9,20.32 ; U1.3 6.24,20.32 ; 22.86,26.56 U6.2 ; U6.2 24.24,27.94 ; U6.2 22.86,29.32 ; U6.2 21.48,27.94 ; 60.96,26.56 U13.4 ; U13.4 62.34,27.94 ; U13.4 60.96,29.32 ; U13.4 59.58,27.94 ; U4.4 29.32,45.72 ; U4.4 27.94,44.34 ; U4.4 26.56,45.72 ; U4.4 27.94,47.1 ; U5.2 9,40.64 ; U5.2 7.62,39.26 ; U5.2 6.24,40.64 ; U5.2 7.62,42.02 ; U15.2 57.26,20.32 ; U15.2 55.88,18.94 ; U15.2 54.5,20.32 ; U15.2 55.88,21.7 ; U3.4 2.54,34.4 ; U3.4 1.16,33.02 ; U3.4 2.54,31.64 ; U3.4 3.92,33.02 ; U15.3 55.88,16.62 ; U15.3 54.5,15.24 ; U15.3 57.26,15.24 ; U15.3 55.88,13.86 ; U2.3 27.3,54.72 ; U2.3 27.3,51.96 ; U2.3 28.69,53.34 ; U2.3 25.92,53.34 ; 34.18,53.34 U16.2 ; U16.2 35.56,54.72 ; U16.2 36.94,53.34 ; U16.2 35.56,51.96 ; U9.3 57.26,53.34 ; U9.3 55.88,54.72 ; U9.3 55.88,51.96 ; U9.3 54.5,53.34 ; 54.5,58.42 U9.2 ; U9.2 55.88,59.8 ; U9.2 55.88,57.04 ; U9.2 57.26,58.42 ; 21.48,15.24 U8.2 ; U8.2 24.24,15.24 ; U8.2 22.86,13.86 ; U8.2 22.86,16.62 ; 7.62,51.96 U7.2 ; U7.2 7.62,54.72 ; U7.2 9,53.34 ; U7.2 6.24,53.34 ; 60.96,13.86 U15.4 ; U15.4 59.58,15.24 ; U15.4 62.34,15.24 ; U15.4 60.96,16.62 ; U8.3 29.32,15.24 ; U8.3 27.94,13.86 ; U8.3 26.56,15.24 ; U8.3 27.94,16.62 ; U3.3 9,33.02 ; U3.3 7.62,34.4 ; U3.3 7.62,31.64 ; U3.3 6.24,33.02 ; U3.2 9,27.94 ; U3.2 7.62,26.56 ; U3.2 6.24,27.94 ; U3.2 7.62,29.32 ; U2.2 23.61,53.34 ; U2.2 22.23,51.96 ; U2.2 22.23,54.72 ; U2.2 20.84,53.34 ; U12.5 36.94,33.02 ; U12.5 35.56,31.64 ; U12.5 35.56,34.4 ; U12.5 34.18,33.02 ; U4.3 29.32,40.64 ; U4.3 27.94,39.26 ; U4.3 26.56,40.64 ; U4.3 27.94,42.02
  BOTTOM w0.145: 39.26,45.72 U14.4 ; U14.4 40.64,47.1 ; U14.4 42.02,45.72 ; U14.4 40.64,44.34 ; U5.5 3.92,40.64 ; U5.5 2.54,39.26 ; U5.5 1.16,40.64 ; U5.5 2.54,42.02 ; 59.58,15.24 U15.4 ; U15.4 60.96,13.86 ; U15.4 62.34,15.24 ; U15.4 60.96,16.62 ; 22.23,57.04 U2.5 ; U2.5 20.84,58.42 ; U2.5 22.23,59.8 ; U2.5 23.61,58.42 ; U16.2 36.94,53.34 ; U16.2 35.56,51.96 ; U16.2 34.18,53.34 ; U16.2 35.56,54.72 ; 18.22,11.34 R2.1 ; R2.1 19.88,11.34 ; R2.1 v3(19.05,12.7) ; R2.1 19.05,10.58 ; 39.26,27.94 U12.3 ; U12.3 40.64,26.56 ; U12.3 40.64,29.32 ; U12.3 42.02,27.94 ; 35.56,13.86 U10.2 ; U10.2 36.94,15.24 ; U10.2 34.18,15.24 ; U10.2 35.56,16.62 ; U3.5 2.54,29.32 ; U3.5 3.92,27.94 ; U3.5 2.54,26.56 ; U3.5 1.16,27.94 ; U10.5 36.94,20.32 ; U10.5 34.18,20.32 ; U10.5 35.56,21.7 ; U10.5 35.56,18.94 ; U1.3 7.62,21.7 ; U1.3 6.24,20.32 ; U1.3 7.62,18.94 ; U1.3 9,20.32 ; 27.3,57.04 U2.4 ; U2.4 28.69,58.42 ; U2.4 25.92,58.42 ; U2.4 27.3,59.8 ; 1.16,15.24 U1.5 ; U1.5 2.54,13.86 ; U1.5 3.92,15.24 ; U1.5 2.54,16.62 ; U15.5 60.96,21.7 ; U15.5 62.34,20.32 ; U15.5 59.58,20.32 ; U15.5 60.96,18.94 ; U6.2 22.86,29.32 ; U6.2 24.24,27.94 ; U6.2 22.86,26.56 ; U6.2 21.48,27.94 ; U1.4 3.92,20.32 ; U1.4 2.54,21.7 ; U1.4 2.54,18.94 ; U1.4 1.16,20.32 ; 60.96,26.56 U13.4 ; U13.4 59.58,27.94 ; U13.4 62.34,27.94 ; U13.4 60.96,29.32 ; U8.3 27.94,16.62 ; U8.3 26.56,15.24 ; U8.3 29.32,15.24 ; U8.3 27.94,13.86 ; U2.3 27.3,54.72 ; U2.3 28.69,53.34 ; U2.3 27.3,51.96 ; U2.3 25.92,53.34 ; 59.58,33.02 U13.5 ; U13.5 60.96,34.4 ; U13.5 60.96,31.64 ; U13.5 62.34,33.02 ; 39.26,20.32 U10.4 ; U10.4 42.02,20.32 ; U10.4 40.64,21.7 ; U10.4 40.64,18.94 ; 43.62,11.34 v2(44.45,11.34) ; v2(44.45,11.34) 45.28,11.34 ; v2(44.45,11.34) 44.45,10.58 ; v2(44.45,11.34) 44.45,12.12 v3(45.03,12.7) ; 54.5,20.32 U15.2 ; U15.2 55.88,21.7 ; U15.2 57.26,20.32 ; U15.2 55.88,18.94 ; U9.3 57.26,53.34 ; U9.3 55.88,54.72 ; U9.3 55.88,51.96 ; U9.3 54.5,53.34 ; 55.88,31.64 U13.2 ; U13.2 55.88,34.4 ; U13.2 54.5,33.02 ; U13.2 57.26,33.02 ; U16.4 40.64,59.8 ; U16.4 39.26,58.42 ; U16.4 40.64,57.04 ; U16.4 42.02,58.42 ; U12.4 42.02,33.02 ; U12.4 40.64,34.4 ; U12.4 39.26,33.02 ; U12.4 40.64,31.64 ; U14.3 42.02,40.64 ; U14.3 40.64,42.02 ; U14.3 40.64,39.26 ; U14.3 39.26,40.64 ; U12.5 36.94,33.02 ; U12.5 35.56,34.4 ; U12.5 35.56,31.64 ; U12.5 34.18,33.02 ; 60.96,51.96 U9.4 ; U9.4 59.58,53.34 ; U9.4 60.96,54.72 ; U9.4 62.34,53.34 ; 20.76,11.34 v2(21.59,11.34) ; v2(21.59,11.34) v3(21.59,12.7) ; v2(21.59,11.34) 21.59,10.58 ; v2(21.59,11.34) 22.42,11.34 ; U2.2 22.23,54.72 ; U2.2 23.61,53.34 ; U2.2 22.23,51.96 ; U2.2 20.84,53.34 ; R10.1 41.91,12.12 v3(42.49,12.7) ; R10.1 42.74,11.34 ; R10.1 41.91,10.58 ; R10.1 41.08,11.34 ; 39.37,10.58 v2(39.37,11.34) ; v2(39.37,11.34) 40.2,11.34 ; v2(39.37,11.34) v3(39.37,12.7) ; v2(39.37,11.34) 38.54,11.34 ; 22.86,18.94 U8.5 ; U8.5 24.24,20.32 ; U8.5 22.86,21.7 ; U8.5 21.48,20.32 ; 40.64,13.86 U10.3 ; U10.3 39.26,15.24 ; U10.3 40.64,16.62 ; U10.3 42.02,15.24 ; U14.2 36.94,40.64 ; U14.2 35.56,42.02 ; U14.2 35.56,39.26 ; U14.2 34.18,40.64 ; 60.96,39.26 U11.4 ; U11.4 62.34,40.64 ; U11.4 60.96,42.02 ; U11.4 59.58,40.64 ; 26.56,40.64 U4.3 ; U4.3 29.32,40.64 ; U4.3 27.94,42.02 ; U4.3 27.94,39.26 ; 55.88,44.34 U11.2 ; U11.2 54.5,45.72 ; U11.2 57.26,45.72 ; U11.2 55.88,47.1 ; J2.4 48,4.39 ; J2.4 45.98,4.39 ; J2.4 46.99,3.39 ; J2.4 46.99,5.4 ; 6.24,15.24 U1.2 ; U1.2 7.62,16.62 ; U1.2 9,15.24 ; U1.2 7.62,13.86 ; 1.16,33.02 U3.4 ; U3.4 2.54,34.4 ; U3.4 3.92,33.02 ; U3.4 2.54,31.64 ; 26.56,27.94 U6.3 ; U6.3 29.32,27.94 ; U6.3 27.94,26.56 ; U6.3 27.94,29.32 ; U11.5 62.34,45.72 ; U11.5 60.96,47.1 ; U11.5 59.58,45.72 ; U11.5 60.96,44.34 ; 22.86,39.26 U4.2 ; U4.2 24.24,40.64 ; U4.2 21.48,40.64 ; U4.2 22.86,42.02 ; v2(16.51,11.34) v3(16.51,12.7) ; v2(16.51,11.34) 15.68,11.34 ; v2(16.51,11.34) 16.51,10.58 ; v2(16.51,11.34) 17.34,11.34 ; 1.16,58.42 U7.4 ; U7.4 2.54,57.04 ; U7.4 2.54,59.8 ; U7.4 3.92,58.42 ; 54.5,27.94 U13.3 ; U13.3 55.88,29.32 ; U13.3 55.88,26.56 ; U13.3 57.26,27.94 ; U3.2 7.62,29.32 ; U3.2 7.62,26.56 ; U3.2 9,27.94 ; U3.2 6.24,27.94 ; 35.56,57.04 U16.5 ; U16.5 34.18,58.42 ; U16.5 36.94,58.42 ; U16.5 35.56,59.8 ; 23.12,4.39 J1.4 ; J1.4 24.13,3.39 ; J1.4 25.14,4.39 ; J1.4 24.13,5.4 ; U15.3 57.26,15.24 ; U15.3 55.88,16.62 ; U15.3 55.88,13.86 ; U15.3 54.5,15.24 ; 7.62,51.96 U7.2 ; U7.2 6.24,53.34 ; U7.2 7.62,54.72 ; U7.2 9,53.34 ; 26.56,33.02 U6.4 ; U6.4 27.94,31.64 ; U6.4 27.94,34.4 ; U6.4 29.32,33.02 ; R4.1 v3(13.97,12.7) ; R4.1 13.97,10.58 ; R4.1 14.8,11.34 ; R4.1 13.14,11.34 ; U11.3 55.88,42.02 ; U11.3 55.88,39.26 ; U11.3 57.26,40.64 ; U11.3 54.5,40.64 ; U5.3 7.62,47.1 ; U5.3 9,45.72 ; U5.3 7.62,44.34 ; U5.3 6.24,45.72 ; U12.2 35.56,29.32 ; U12.2 36.94,27.94 ; U12.2 35.56,26.56 ; U12.2 34.18,27.94 ; U5.4 3.92,45.72 ; U5.4 2.54,47.1 ; U5.4 2.54,44.34 ; U5.4 1.16,45.72 ; 55.88,57.04 U9.2 ; U9.2 54.5,58.42 ; U9.2 55.88,59.8 ; U9.2 57.26,58.42 ; 59.58,58.42 U9.5 ; U9.5 60.96,57.04 ; U9.5 62.34,58.42 ; U9.5 60.96,59.8 ; 22.86,44.34 U4.5 ; U4.5 21.48,45.72 ; U4.5 24.24,45.72 ; U4.5 22.86,47.1 ; 46.99,5.93 J2.3 ; J2.3 46.99,7.94 ; J2.3 48,6.93 ; U7.3 9,58.42 ; U7.3 7.62,59.8 ; U7.3 6.24,58.42 ; U7.3 7.62,57.04 ; U5.2 7.62,42.02 ; U5.2 6.24,40.64 ; U5.2 7.62,39.26 ; U5.2 9,40.64 ; 21.48,33.02 U6.5 ; U6.5 22.86,34.4 ; U6.5 22.86,31.64 ; U6.5 24.24,33.02 ; 27.94,18.94 U8.4 ; U8.4 26.56,20.32 ; U8.4 27.94,21.7 ; U8.4 29.32,20.32 ; R12.1 37.66,11.34 ; R12.1 36,11.34 ; R12.1 36.83,10.58 ; R12.1 v3(36.83,12.7) ; 21.48,15.24 U8.2 ; U8.2 24.24,15.24 ; U8.2 22.86,13.86 ; U8.2 22.86,16.62 ; 2.54,51.96 U7.5 ; U7.5 1.16,53.34 ; U7.5 3.92,53.34 ; U7.5 2.54,54.72 ; U14.5 36.94,45.72 ; U14.5 35.56,44.34 ; U14.5 34.18,45.72 ; U14.5 35.56,47.1 ; 24.13,5.93 J1.3 ; J1.3 25.14,6.93 ; J1.3 24.13,7.94 ; 26.56,45.72 U4.4 ; U4.4 29.32,45.72 ; U4.4 27.94,44.34 ; U4.4 27.94,47.1 ; 6.24,33.02 U3.3 ; U3.3 7.62,34.4 ; U3.3 7.62,31.64 ; U3.3 9,33.02 ; 39.26,53.34 U16.3 ; U16.3 40.64,54.72 ; U16.3 42.02,53.34 ; U16.3 40.64,51.96
  vias: v1(1.58,24.6) v1(1.58,23.18) v1(1.58,10.11) v1(1.58,7.58) v1(1.58,4.85) v1(1.58,3.43) v1(1.88,11.49) v1(1.95,6.22) v1(2.21,12.87) v1(2.21,8.85) v1(2.21,2.17) v1(2.26,25.84) v1(2.53,22.14) v1(2.79,56.13) v1(2.79,51.05) v1(2.79,48.51) v1(2.79,43.43) v1(2.79,38.35) v1(2.79,35.81) v1(2.79,30.73) v1(2.79,18.03) v1(3.2,1.16) v1(3.5,24.13) v1(3.57,26.36) v1(3.93,21.9) v1(4.12,47.42) v1(4.12,46.01) v1(4.12,36.14) v1(4.12,34.72) v1(4.12,33.31) v1(4.12,14.95) v1(4.14,11.51) v1(4.14,10.24) v1(4.14,8.83) v1(4.14,7.41) v1(4.14,6) v1(4.14,4.58) v1(4.14,3.17) v1(4.29,48.83) v1(4.41,37.52) v1(4.6,0.94) v1(4.82,24.13) v1(4.98,26.36) v1(5.08,12.7) v1(5.33,58.67) v1(5.33,53.59) v1(5.33,51.05) v1(5.29,49.83) v1(5.33,40.89) v1(5.33,38.35) v1(5.33,28.19) v1(5.34,21.9) v1(5.33,20.57) v1(5.71,1.81) v1(6.04,47.42) v1(6.04,46.01) v1(6.04,36.14) v1(6.04,34.72) v1(6.04,33.31) v1(6.04,14.95) v1(6,13.54) v1(6.04,10.24) v1(6.04,8.83) v1(6.04,7.41) v1(6.04,6) v1(6.04,4.58) v1(6.04,3.17) v1(6.24,24.13) v1(6.29,50.83) v1(6.4,26.36) v1(6.8,48.62) v1(6.76,21.9) v1(6.92,38.43) v1(6.98,1.18) v1(7.11,12.66) v1(7.41,36.5) v1(7.67,51.13) v1(7.65,24.13) v1(7.81,26.36) v1(7.91,56.84) v1(7.91,54.92) v1(7.87,43.43) v1(7.87,30.73) v1(7.87,18.03) v1(7.87,12.95) v1(7.95,11.51) v1(7.95,10.24) v1(7.95,8.83) v1(7.95,7.41) v1(7.95,6) v1(7.95,4.58) v1(7.95,3.17) v1(8.09,49.2) v1(8.17,21.9) v1(8.33,38.43) v1(8.37,0.94) v1(8.82,36.5) v1(9.09,51.13) v1(9.07,24.13) v1(9.09,12.35) v1(9.2,35.14) v1(9.2,33.73) v1(9.2,32.31) v1(9.2,30.9) v1(9.2,29.48) v1(9.2,28.07) v1(9.2,26.65) v1(9.2,20.92) v1(9.2,19.51) v1(9.2,18.09) v1(9.2,16.68) v1(9.2,13.85) v1(9.32,56.84) v1(9.32,54.92) v1(9.5,49.2) v1(9.5,1.8) v1(9.75,38.43) v1(9.85,10.24) v1(9.85,8.83) v1(9.85,7.41) v1(9.85,6) v1(9.85,4.58) v1(9.85,3.17) v1(10.41,58.67) v1(10.41,53.59) v1(10.41,43.43) v1(10.41,40.89) v1(10.5,51.13) v1(10.5,12.39) v1(10.74,56.84) v1(10.74,54.92) v1(10.84,48.76) v1(10.79,24.77) v1(10.79,23.5) v1(10.92,9.31) v1(11.1,47.36) v1(11.1,45.95) v1(11.1,44.53) v1(11.1,43.12) v1(11.1,41.7) v1(11.1,40.29) v1(11.1,38.87) v1(11.1,37.46) v1(11.12,36.14) v1(11.12,34.72) v1(11.12,33.31) v1(11.12,31.89) v1(11.12,30.48) v1(11.12,29.06) v1(11.12,27.65) v1(11.12,26.23) v1(11.12,22.13) v1(11.12,20.72) v1(11.12,19.3) v1(11.12,17.89) v1(11.12,16.47) v1(11.12,15.06) v1(11.53,11.42) v1(11.79,50.53) v1(11.76,7.41) v1(11.76,6) v1(11.76,4.58) v1(11.76,3.17) v1(12.12,13.83) v1(12.15,56.84) v1(12.15,54.92) v1(12.33,9.2) v1(12.48,11.74) v1(12.95,58.67) v1(13.01,53.79) v1(13.01,52.38) v1(13.01,50.96) v1(13.01,49.55) v1(13.01,48.13) v1(13.01,46.72) v1(13.01,45.3) v1(13.01,43.89) v1(13.01,42.47) v1(13.01,41.06) v1(13.01,39.64) v1(13.01,38.23) v1(13.01,36.81) v1(13.01,35.4) v1(13.01,33.99) v1(13.01,32.57) v1(13.01,31.16) v1(13.01,29.74) v1(13.01,28.33) v1(13.01,26.91) v1(13.01,25.5) v1(13.01,24.08) v1(13.01,22.67) v1(13.01,21.25) v1(13.01,19.84) v1(13.01,18.42) v1(13.03,17.01) v1(12.95,7.87) v1(12.95,2.79) v1(13.07,15.6) v1(13.51,56.43) v1(13.79,17.24) v1(14.28,16.37) v1(14.31,14.93) v1(14.51,55.43) v1(14.93,54.08) v1(14.93,52.67) v1(14.93,51.25) v1(14.93,49.84) v1(14.93,48.42) v1(14.93,47.01) v1(14.93,45.59) v1(14.93,44.18) v1(14.93,42.76) v1(14.93,41.35) v1(14.93,39.93) v1(14.93,38.52) v1(14.93,37.1) v1(14.93,35.69) v1(14.93,34.27) v1(14.93,32.86) v1(14.93,31.45) v1(14.93,30.03) v1(14.93,28.62) v1(14.93,27.2) v1(14.93,25.79) v1(14.93,24.37) v1(14.93,22.96) v1(14.93,21.54) v1(14.93,20.13) v1(15.49,58.67) v1(15.49,56.13) v1(15.49,2.79) v1(15.9,54.09) v1(16.03,17.71) v1(16.2,14.93) v1(16.84,51.23) v1(16.84,49.81) v1(16.84,48.4) v1(16.84,46.98) v1(16.84,45.57) v1(16.84,44.15) v1(16.84,42.74) v1(16.84,41.32) v1(16.84,39.91) v1(16.84,38.49) v1(16.84,37.08) v1(16.84,35.66) v1(16.84,34.25) v1(16.84,32.83) v1(16.84,31.42) v1(16.84,30.01) v1(16.84,28.59) v1(16.84,27.18) v1(16.84,25.76) v1(16.84,24.35) v1(16.84,22.93) v1(16.84,21.52) v1(16.84,20.1) v1(16.84,18.69) v1(16.9,55.09) v1(17.03,16.71) v1(17.14,52.61) v1(18.03,58.67) v1(18.03,56.13) v1(18.03,53.59) v1(18.03,2.79) v1(18.13,50.49) v1(18.74,48.27) v1(18.74,46.85) v1(18.74,45.44) v1(18.74,44.02) v1(18.74,42.61) v1(18.74,41.19) v1(18.74,39.78) v1(18.74,38.36) v1(19.03,14.71) v1(19.11,56.84) v1(19.14,54.61) v1(19.07,36.95) v1(19.07,35.53) v1(19.07,34.12) v1(19.07,32.7) v1(19.07,31.29) v1(19.07,29.87) v1(19.07,28.46) v1(19.07,27.04) v1(19.07,25.63) v1(19.07,24.21) v1(19.07,22.8) v1(19.07,21.38) v1(19.07,19.97) v1(19.07,18.55) v1(19.07,17.14) v1(19.07,15.73) v1(19.55,50.49) v1(19.71,38.21) v1(20.12,48.57) v1(20.52,56.84) v1(20.52,54.92) v1(20.57,53.59) v1(20.57,45.97) v1(20.57,43.43) v1(20.57,40.89) v1(20.57,2.79) v1(20.84,39.06) v1(20.96,50.49) v1(21.28,36.95) v1(21.28,35.53) v1(21.28,34.12) v1(21.28,32.7) v1(21.28,31.29) v1(21.28,29.87) v1(21.28,28.46) v1(21.28,27.04) v1(21.28,25.63) v1(21.28,24.21) v1(21.28,22.8) v1(21.28,21.38) v1(21.28,19.97) v1(21.28,18.55) v1(21.28,17.14) v1(21.28,15.73) v1(21.28,14.31) v1(21.54,48.57) v1(21.94,56.84) v1(21.94,54.92) v1(22.25,39.06) v1(22.38,50.49) v1(22.68,37.14) v1(22.95,48.57) v1(23.11,43.43) v1(23.11,30.73) v1(23.11,23.11) v1(23.11,18.03) v1(23.05,12.35) v1(23.11,2.79) v1(23.19,24.16) v1(23.35,56.84) v1(23.35,54.92) v1(23.51,10.08) v1(23.5,8.89) v1(23.57,36.03) v1(23.67,39.06) v1(23.79,50.49) v1(24.22,23.19) v1(24.26,25.07) v1(24.3,13.03) v1(24.37,48.57) v1(24.44,47.16) v1(24.44,19.22) v1(24.51,11.08) v1(24.73,35.23) v1(24.78,38.18) v1(24.77,8.89) v1(25.2,50.45) v1(25.31,27) v1(25.36,22.35) v1(25.65,53.59) v1(25.65,40.89) v1(25.65,33.27) v1(25.65,28.19) v1(25.68,25.07) v1(25.65,15.49) v1(25.71,13.03) v1(25.65,2.79) v1(25.75,37.16) v1(25.92,11.1) v1(26.04,8.89) v1(26.15,35.23) v1(26.21,49.45) v1(26.36,48.04) v1(26.36,46.63) v1(26.36,45.21) v1(26.36,21.35) v1(26.36,19.94) v1(26.69,38.21) v1(26.77,31.44) v1(26.83,29.52) v1(27.09,25.07) v1(27.12,13.03) v1(27.28,10.73) v1(27.5,35.66) v1(27.61,9.35) v1(27.81,5.12) v1(28.19,56.13) v1(28.19,51.05) v1(28.19,48.51) v1(28.19,43.43) v1(28.18,31.44) v1(28.24,29.52) v1(28.19,23.11) v1(28.19,18.03) v1(28.19,2.79) v1(28.27,36.85) v1(28.37,12.36) v1(28.51,25.07) v1(28.81,4.12) v1(29.24,39.06) v1(29.37,11.36) v1(29.52,24.08) v1(29.52,22.67) v1(29.52,21.25) v1(29.52,19.84) v1(29.52,18.43) v1(29.52,17.01) v1(29.52,15.6) v1(29.52,14.18) v1(29.52,12.77) v1(29.54,10.12) v1(29.54,8.7) v1(29.54,7.29) v1(29.54,5.88) v1(29.6,31.44) v1(29.55,27) v1(29.68,36.91) v1(29.66,29.52) v1(30.15,35.57) v1(30.15,34.16) v1(30.15,32.74) v1(30.23,4.12) v1(30.61,38.7) v1(30.58,26.02) v1(30.73,58.67) v1(30.73,56.13) v1(30.73,53.59) v1(30.73,51.05) v1(30.73,48.51) v1(30.73,45.97) v1(30.73,43.43) v1(30.73,40.89) v1(30.73,28.19) v1(30.73,2.79) v1(31.06,29.71) v1(31.44,24.9) v1(31.54,5.11) v1(31.61,37.7) v1(31.74,23.49) v1(31.74,22.07) v1(31.74,20.66) v1(31.74,19.24) v1(31.74,17.83) v1(31.74,16.41) v1(31.74,15) v1(31.74,13.58) v1(31.74,12.17) v1(31.74,10.75) v1(31.74,9.34) v1(31.74,7.92) v1(31.74,6.51) v1(32.08,36.37) v1(32.08,34.95) v1(32.08,33.54) v1(32.08,32.12) v1(32.06,30.71) v1(32.3,25.4) v1(32.3,3.17) v1(33.01,38.18) v1(33.02,29.84) v1(33.27,58.67) v1(33.27,56.13) v1(33.27,53.59) v1(33.27,51.05) v1(33.27,48.51) v1(33.27,45.97) v1(33.27,43.43) v1(33.27,40.89) v1(33.27,28.19) v1(33.33,26.36) v1(33.35,2.21) v1(33.86,29.52) v1(33.98,36.27) v1(33.98,34.85) v1(33.98,33.44) v1(33.98,32.02) v1(33.98,14.82) v1(33.96,8.8) v1(33.96,7.39) v1(33.96,5.97) v1(33.96,4.56) v1(34.1,16.23) v1(34.41,38.43) v1(34.41,21.62) v1(34.53,24.43) v1(34.48,18.95) v1(34.46,12.15) v1(34.62,23.02) v1(34.62,17.54) v1(34.62,13.55) v1(34.62,10.74) v1(34.75,26.36) v1(34.76,2.29) v1(35.27,31.44) v1(35.27,29.52) v1(35.38,36.5) v1(35.81,56.13) v1(35.81,51.05) v1(35.81,43.43) v1(35.82,38.43) v1(35.81,25.65) v1(35.81,18.03) v1(35.81,12.95) v1(35.81,7.87) v1(35.81,5.33) v1(35.76,3.29) v1(35.87,35.18) v1(36.43,22.53) v1(36.5,47.3) v1(36.56,48.71) v1(36.69,31.44) v1(36.69,29.52) v1(36.69,24.46) v1(36.86,34.17) v1(37.14,54.07) v1(37.14,52.65) v1(37.14,44.59) v1(37.13,37.89) v1(37.14,20.61) v1(37.14,19.19) v1(37.52,51.29) v1(37.56,49.71) v1(37.71,24.43) v1(37.7,21.91) v1(37.79,36.64) v1(37.77,13.59) v1(38.26,33.96) v1(38.35,58.67) v1(38.35,40.89) v1(38.35,35.81) v1(38.35,28.19) v1(38.35,25.65) v1(38.35,15.49) v1(38.35,2.79) v1(38.5,47.31) v1(38.81,37.63) v1(38.96,49.86) v1(39.04,23.15) v1(39,14.3) v1(39.06,54.19) v1(39.06,52.77) v1(39.06,46.01) v1(39.06,44.59) v1(39.06,19.19) v1(39.6,34.43) v1(39.92,47.3) v1(39.97,38.43) v1(40.05,51.76) v1(40.25,24.43) v1(40.28,49.65) v1(40.33,35.64) v1(40.27,26.36) v1(40.33,23.02) v1(40.89,56.13) v1(40.89,43.43) v1(40.89,30.73) v1(40.89,18.03) v1(40.89,2.79) v1(41.33,47.3) v1(41.39,38.43) v1(41.47,51.76) v1(41.45,36.5) v1(41.65,21.87) v1(41.69,49.52) v1(42.22,35.32) v1(42.22,33.9) v1(42.22,32.49) v1(42.22,31.07) v1(42.22,29.66) v1(42.22,28.24) v1(42.22,26.83) v1(42.22,25.41) v1(42.22,24) v1(42.22,22.58) v1(42.22,21.17) v1(42.22,19.75) v1(42.22,18.34) v1(42.22,16.92) v1(42.22,15.51) v1(42.75,47.3) v1(42.8,38.43) v1(42.88,51.76) v1(43.11,49.52) v1(43.43,58.67) v1(43.43,56.13) v1(43.43,53.59) v1(43.43,2.79) v1(43.49,45.38) v1(43.49,41.17) v1(43.57,43.97) v1(43.74,42.57) v1(43.8,16.58) v1(43.87,37.5) v1(44.03,46.69) v1(44.12,39.91) v1(44.12,38.49) v1(44.14,36.11) v1(44.14,34.7) v1(44.14,33.28) v1(44.14,31.87) v1(44.14,30.45) v1(44.14,29.04) v1(44.14,27.62) v1(44.14,26.21) v1(44.14,24.79) v1(44.14,23.38) v1(44.14,21.96) v1(44.14,20.55) v1(44.14,19.13) v1(44.14,17.72) v1(44.3,51.76) v1(44.49,48.94) v1(45.53,51.07) v1(45.49,47.94) v1(45.97,58.67) v1(45.97,56.13) v1(45.97,53.59) v1(46.03,46.3) v1(46.03,44.88) v1(46.03,43.47) v1(45.97,43.43) v1(46.03,42.05) v1(46.03,40.64) v1(46.03,39.22) v1(46.03,37.81) v1(46.03,36.39) v1(46.03,34.98) v1(46.03,33.56) v1(46.03,32.15) v1(46.03,30.73) v1(45.97,30.73) v1(46.03,29.32) v1(46.03,27.9) v1(46.03,26.49) v1(46.03,25.07) v1(46.03,23.66) v1(46.03,22.25) v1(46.03,20.83) v1(46.03,19.42) v1(46.03,15.17) v1(45.97,2.79) v1(46.29,9.31) v1(46.54,50.07) v1(47.54,49.08) v1(47.7,9.31) v1(47.95,47.72) v1(47.95,46.31) v1(47.95,18.01) v1(47.95,16.6) v1(47.95,15.18) v1(48.11,11.44) v1(48.27,44.41) v1(48.27,42.99) v1(48.27,41.58) v1(48.27,40.17) v1(48.27,38.75) v1(48.27,37.34) v1(48.27,35.92) v1(48.27,34.51) v1(48.27,33.09) v1(48.27,31.68) v1(48.27,30.26) v1(48.27,28.85) v1(48.27,27.43) v1(48.27,26.02) v1(48.27,24.6) v1(48.27,23.19) v1(48.27,21.77) v1(48.51,58.67) v1(48.51,56.13) v1(48.51,53.59) v1(48.51,51.05) v1(48.51,2.79) v1(48.88,45.79) v1(49.12,9.31) v1(49.25,13.66) v1(49.34,19.27) v1(49.52,16.6) v1(49.52,15.18) v1(49.53,11.44) v1(49.88,46.79) v1(50.49,44.5) v1(50.47,42.76) v1(50.47,41.35) v1(50.47,39.93) v1(50.47,38.52) v1(50.47,37.1) v1(50.47,35.69) v1(50.47,34.27) v1(50.47,32.86) v1(50.47,31.44) v1(50.47,30.03) v1(50.47,28.61) v1(50.47,27.2) v1(50.47,25.78) v1(50.47,24.37) v1(50.47,22.95) v1(50.47,21.54) v1(50.47,20.12) v1(50.53,9.31) v1(50.8,13.34) v1(50.88,47.79) v1(50.94,11.44) v1(51.05,58.67) v1(51.05,56.13) v1(51.05,53.59) v1(51.05,51.05) v1(51.05,7.87) v1(51.05,2.79) v1(51.39,45.59) v1(51.38,43.85) v1(51.74,8.58) v1(51.74,5.95) v1(51.74,4.53) v1(51.88,48.79) v1(52.01,3.14) v1(52.08,13.66) v1(52.26,7.26) v1(52.39,46.59) v1(52.4,40.85) v1(52.4,39.44) v1(52.38,37.68) v1(52.38,36.27) v1(52.38,34.85) v1(52.38,33.44) v1(52.38,32.02) v1(52.38,30.61) v1(52.38,29.19) v1(52.38,27.78) v1(52.38,26.36) v1(52.38,24.95) v1(52.38,23.53) v1(52.38,22.12) v1(52.38,20.7) v1(52.38,19.29) v1(52.38,17.87) v1(52.38,16.46) v1(52.38,15.04) v1(52.36,11.44) v1(52.76,44.14) v1(52.76,42.22) v1(52.88,49.79) v1(53.08,2.21) v1(53.28,38.77) v1(53.29,10.3) v1(53.39,47.59) v1(53.59,58.67) v1(53.59,56.13) v1(53.59,53.59) v1(53.59,45.97) v1(53.59,40.89) v1(53.91,8.53) v1(53.98,12.7) v1(54.03,5.95) v1(54.03,4.53) v1(54.11,50.49) v1(54.18,44.14) v1(54.18,42.22) v1(54.16,11.07) v1(54.3,36.43) v1(54.3,35.01) v1(54.3,33.6) v1(54.3,32.18) v1(54.3,30.77) v1(54.3,29.35) v1(54.3,26.52) v1(54.3,25.11) v1(54.3,23.69) v1(54.3,22.28) v1(54.3,20.86) v1(54.3,19.45) v1(54.3,18.03) v1(54.3,16.62) v1(54.3,13.79) v1(54.41,48.57) v1(54.54,9.8) v1(54.54,7.26) v1(54.5,2.21) v1(54.67,39.06) v1(55.41,51.05) v1(55.52,37.14) v1(55.59,44.14) v1(55.59,42.22) v1(55.63,13.03) v1(55.72,2.93) v1(55.82,48.76) v1(56.13,56.13) v1(56.08,39.06) v1(56.13,35.81) v1(56.13,30.73) v1(56.13,25.65) v1(56.13,23.11) v1(56.13,18.03) v1(56.45,8.53) v1(56.57,5.95) v1(56.57,4.53) v1(56.7,11.07) v1(56.82,49.75) v1(56.94,37.14) v1(57.15,13.34) v1(57.08,9.8) v1(57.08,7.26) v1(57.41,2.82) v1(57.5,39.06) v1(57.5,35.37) v1(57.46,33.95) v1(57.46,32.54) v1(57.46,14.95) v1(57.83,50.75) v1(58.35,37.14) v1(58.42,12.7) v1(58.5,36.37) v1(58.67,58.67) v1(58.67,48.51) v1(58.67,45.97) v1(58.67,40.89) v1(58.67,28.19) v1(58.67,25.65) v1(58.67,23.11) v1(58.67,20.57) v1(58.69,2.21) v1(58.83,51.75) v1(58.91,39.06) v1(58.99,8.53) v1(59.05,11.43) v1(59.11,5.95) v1(59.11,4.53) v1(59.38,53.05) v1(59.38,33.52) v1(59.38,32.11) v1(59.38,14.95) v1(59.62,9.8) v1(59.62,7.26) v1(59.69,36.83) v1(60.05,13.7) v1(60.1,2.23) v1(60.33,39.06) v1(60.3,34.6) v1(60.96,36.83) v1(61.05,12.7) v1(61.1,3.23) v1(61.21,56.13) v1(61.21,51.05) v1(61.21,48.51) v1(61.21,43.43) v1(61.21,30.73) v1(61.21,25.65) v1(61.21,23.11) v1(61.21,18.03) v1(61.29,11.31) v1(61.29,4.63) v1(61.38,6.04) v1(61.49,8.69) v1(61.74,39.06) v1(61.71,34.6) v1(61.92,10.04) v1(61.92,7.35) v2(13.97,11.43) v2(19.05,11.43) v2(36.83,11.43) v2(41.91,11.43)
N17882: length 60.2
  TOP w0.145: J1.11 R4.2 13.97,9.76 13.57,10.16 11.43,10.16 10.16,11.43 9.52,11.43 8.89,10.8 8.89,2.54 8.26,1.91 7.62,1.91 6.99,2.54 6.99,10.79 6.98,10.79 6.99,10.8 6.99,11.43 6.35,12.06 5.71,12.06 5.08,11.43 5.08,2.54 4.45,1.91 3.81,1.91 3.17,2.54 3.17,3.17 2.54,3.81 2.54,4.45 3.17,5.08 3.17,6.35 2.54,6.99 2.54,7.62 3.17,8.26 3.17,9.53 2.54,10.16 2.54,10.79 3.17,11.43 3.17,12.7 3.81,13.34 4.45,13.34 5.08,13.97 U1.1
N17894: length 60.1
  TOP w0.145: J1.9 R3.2 16.51,9.75 15.24,11.02 15.24,12.06 14.61,12.7 11.43,12.7 10.16,13.97 10.16,22.23 9.53,22.86 3.17,22.86 2.54,23.5 2.54,24.77 3.17,25.4 9.53,25.4 10.16,26.04 10.16,34.29 10.16,36.83 9.55,37.47 5.71,37.47 5.08,36.83 U3.1
N17906: length 60.1
  TOP w0.145: J1.7 R2.2 19.05,9.76 17.78,11.03 17.78,12.7 16.51,13.97 13.34,13.97 12.06,15.24 12.06,48.89 10.79,50.16 6.98,50.16 5.08,48.26 U5.1
N17918: length 60.2
  TOP w0.145: J1.5 R1.2 21.59,9.75 20.32,11.02 20.32,12.06 13.97,18.41 13.97,54.61 12.7,55.88 U7.1
N17930: length 60.4
  BOTTOM w0.145: U2.1 19.05,55.88 15.88,52.7 15.88,19.05 15.24,18.41 15.24,11.02 13.97,9.75 R5.2 14.04,8.98 15.24,7.78 15.24,5.66 J1.12
N17948: length 59.9
  BOTTOM w0.145: U4.1 25.4,48.9 24.77,49.53 18.41,49.53 17.78,48.9 17.78,11.02 16.51,9.75 R6.2 ; J1.10 17.78,5.66 17.78,7.78 16.58,8.98
N17973: length 60.4
  BOTTOM w0.145: U6.1 30.48,30.48 31.11,31.12 31.11,36.83 29.84,38.1 27.94,38.1 27.3,37.47 27.3,36.83 26.67,36.2 24.77,36.2 24.13,36.83 24.13,37.47 23.5,38.1 20.95,38.1 20.32,37.47 20.32,11.02 19.05,9.75 R7.2 19.12,8.98 20.4,7.7 20.4,5.75 J1.8
N17998: length 60
  BOTTOM w0.145: U8.1 25.4,20.96 24.13,22.23 22.86,22.23 22.23,22.86 22.23,25.4 22.86,26.04 29.21,26.04 30.48,24.77 30.48,5.71 29.84,5.08 29.21,5.08 28.57,5.71 28.57,10.79 27.3,12.07 24.13,12.07 21.66,9.6 21.66,8.98 ; J1.6 22.86,5.66 22.86,7.78 21.66,8.98 ; R8.2 21.66,8.98
N19655: length 60.4
  TOP w0.145: J2.11 R12.2 36.83,9.76 38.1,11.03 38.1,12.55 38.87,13.34 41.91,13.34 49.53,20.95 49.53,45.09 53.98,49.53 55.24,49.53 55.24,49.53 58.42,52.7 U9.1
N19661: length 60.2
  TOP w0.145: U11.1 52.07,43.18 51.44,42.55 51.44,14.4 51,13.97 50.6,13.97 50.16,14.4 50.16,17.78 49.63,18.31 49.43,18.31 48.9,17.78 48.9,14.61 48.26,13.97 43.81,13.97 42.55,12.7 41.28,12.7 40.64,12.06 40.64,11.02 39.37,9.75 R11.2 J2.9
N19667: length 59.9
  TOP w0.145: U13.1 58.42,34.92 59.05,35.56 61.6,35.56 62.23,36.19 62.23,37.47 61.59,38.1 53.98,38.1 53.34,37.46 53.34,13.33 52.71,12.7 43.81,12.7 43.18,12.07 43.18,11.02 41.91,9.75 R10.2 J2.7
N19673: length 60.2
  TOP w0.145: U15.1 58.42,13.97 60.33,12.06 60.33,10.79 60.96,10.16 60.96,9.53 60.33,8.89 60.33,8.26 60.96,7.62 60.96,6.99 60.33,6.35 60.33,3.81 59.69,3.17 58.42,3.17 57.78,3.81 57.78,6.35 58.42,6.99 58.42,7.62 57.78,8.26 57.78,8.89 58.42,9.53 58.42,10.16 57.78,10.79 57.78,11.43 57.15,12.06 55.88,12.06 55.24,11.43 55.24,10.79 55.88,10.16 55.88,9.53 55.24,8.89 55.24,8.26 55.88,7.62 55.88,6.99 55.24,6.35 55.24,3.81 54.61,3.17 53.34,3.17 52.7,3.81 52.7,6.35 53.34,6.99 53.34,7.62 52.7,8.26 52.7,9.53 51.96,10.27 44.97,10.27 44.45,9.75 R9.2 J2.5
N19679: length 60.1
  BOTTOM w0.145: J2.12 38.1,5.66 38.1,7.78 36.9,8.98 R13.2 36.83,9.75 36.42,10.16 35.56,10.16 34.92,9.53 34.92,3.81 34.29,3.17 33.66,3.17 33.02,3.81 33.02,9.53 33.66,10.16 33.66,10.79 33.02,11.43 33.02,12.06 33.66,12.7 33.66,13.34 33.02,13.97 33.02,16.51 33.66,17.14 33.66,18.41 33.02,19.05 33.02,21.59 33.66,22.23 33.66,22.86 33.02,23.5 33.02,24.77 33.66,25.4 34.92,25.4 35.56,24.77 35.56,24.13 36.2,23.5 38.1,23.5 38.73,24.13 38.73,24.77 39.37,25.4 40.64,25.4 41.27,24.77 41.27,22.86 40.64,22.23 39.37,22.23 38.1,20.95 U10.1
N19687: length 60.4
  BOTTOM w0.145: J2.10 40.64,5.66 40.64,7.78 39.44,8.98 R14.2 39.37,9.75 40.64,11.02 40.64,12.06 43.18,14.61 43.18,36.83 42.55,37.47 40.01,37.47 39.37,36.83 39.37,35.56 38.73,34.92 37.47,34.92 36.83,35.56 36.83,36.83 36.2,37.47 33.66,37.47 33.02,36.83 33.02,31.11 33.65,30.48 U12.1
N19697: length 60.1
  BOTTOM w0.145: J2.8 43.18,5.66 43.18,7.78 41.98,8.98 R15.2 41.91,9.75 43.18,11.02 43.18,12.06 45.09,13.97 45.09,40.64 44.45,41.27 44.45,41.91 45.09,42.55 45.09,43.81 44.45,44.45 44.45,45.09 45.09,45.72 45.09,46.99 43.81,48.26 40.01,48.26 39.37,48.9 38.1,48.9 37.47,48.26 37.47,46.99 38.1,46.35 U14.1
N19707: length 60.3
  BOTTOM w0.145: U16.1 38.1,52.07 39.37,50.8 44.45,50.8 46.99,48.26 46.99,12.29 44.45,9.75 R16.2 44.52,8.98 45.72,7.78 45.72,5.66 J2.6

## Copper pours and planes (outline as drawn; the poured copper is in the pictures)
GND on TOP, BOTTOM, GND1, GND2: 0.51,60.45 62.99,60.45 62.99,0.51 0.51,0.51

## Text on the board
Ref Des/Silkscreen Bottom: 4321 | 8765
Ref Des/Silkscreen Top: JA8 | JA7 | JA6 | JA5 | 5678 | JA1 | JA2 | JA3 | JA4 | JB8 | JB7 | JB6 | JB5 | 1234 | JB1 | JB2 | JB3 | JB4
